# Altium PCB 175-00026, rev1, BlackFin Shorting Block.PcbDoc
Units mil, origin at the board's own origin, x right, y up, seen from the top; angles counter-clockwise.
Board outline 1220.47 x 1417.32 mil, 2 copper layers (Top Layer (*.GTL), Bottom Layer (*.GBL)); 4 components, 118 nets, 124 pads, 120 vias.
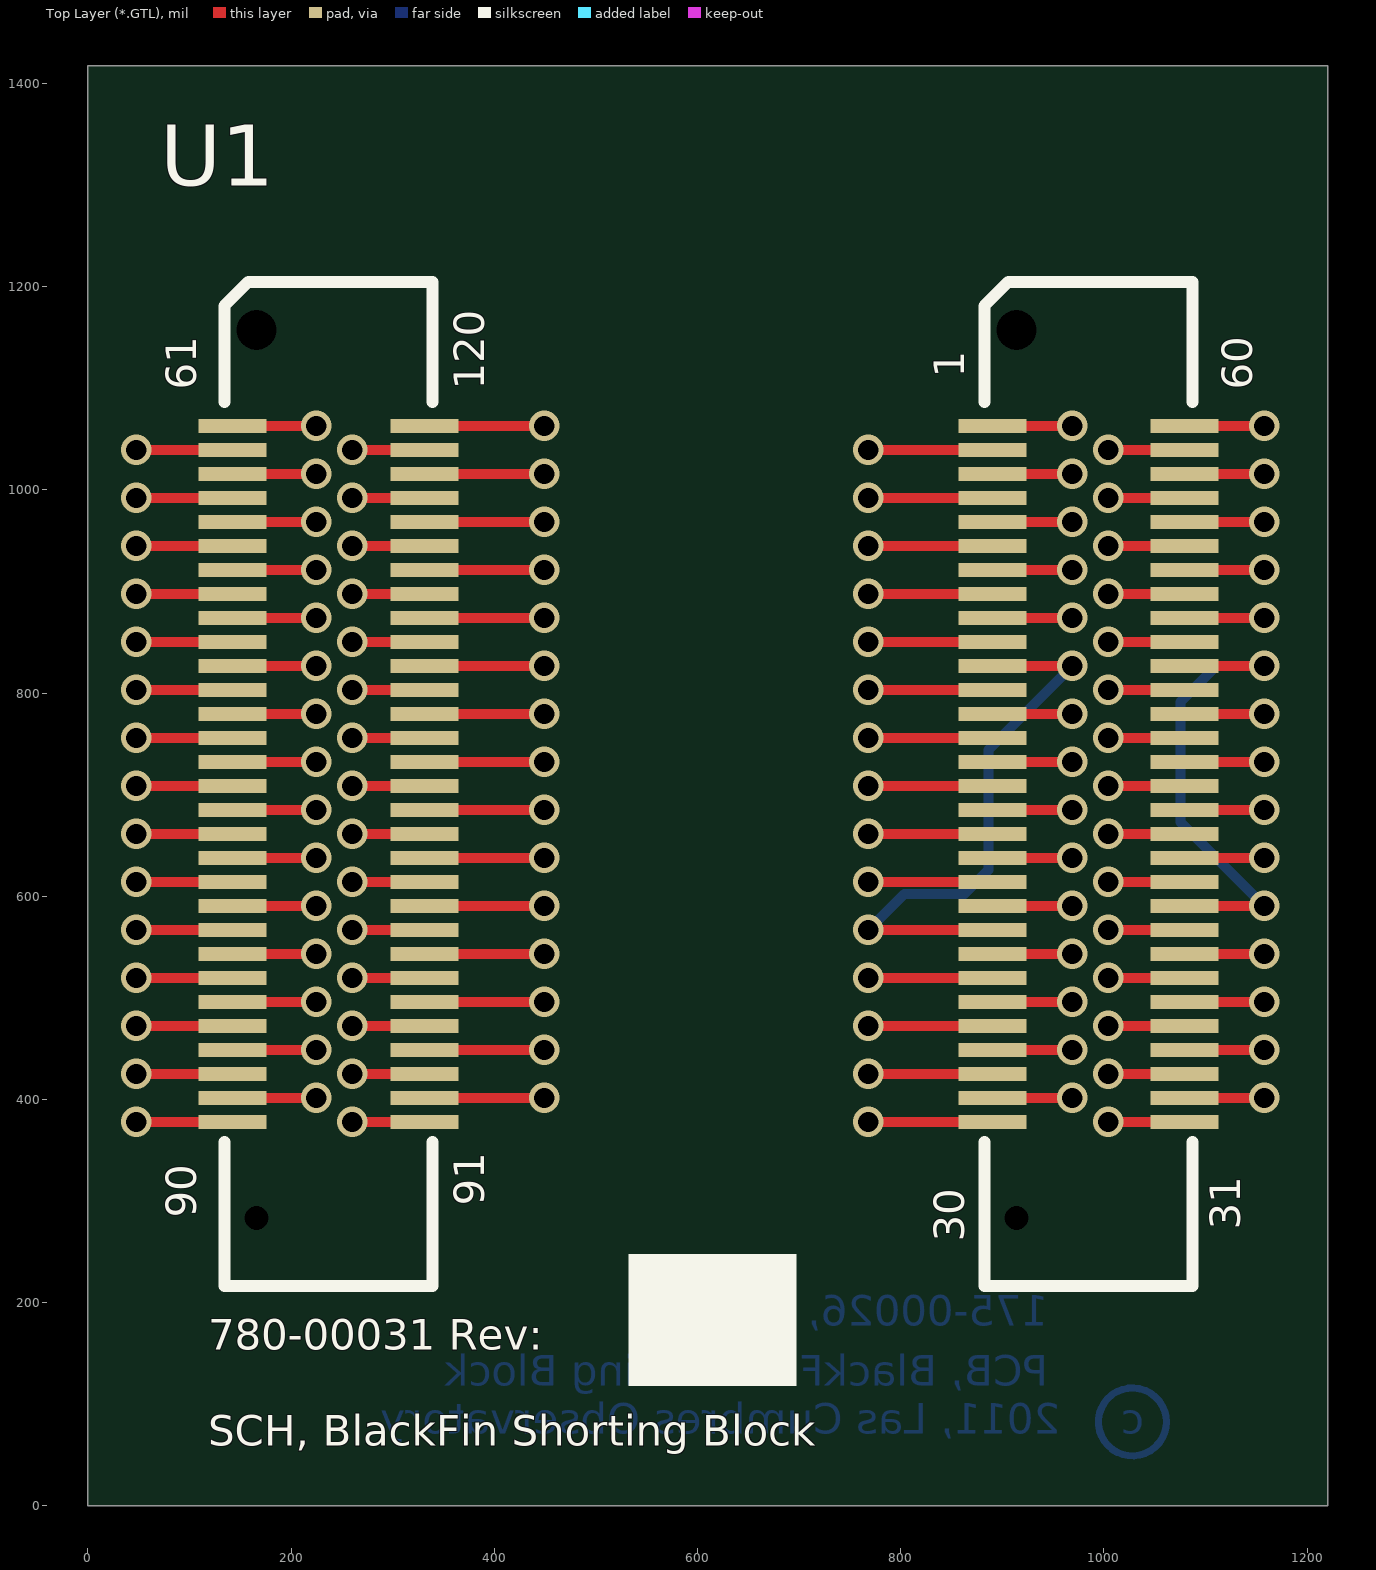
[diagram p0: Top Layer (*.GTL) view]
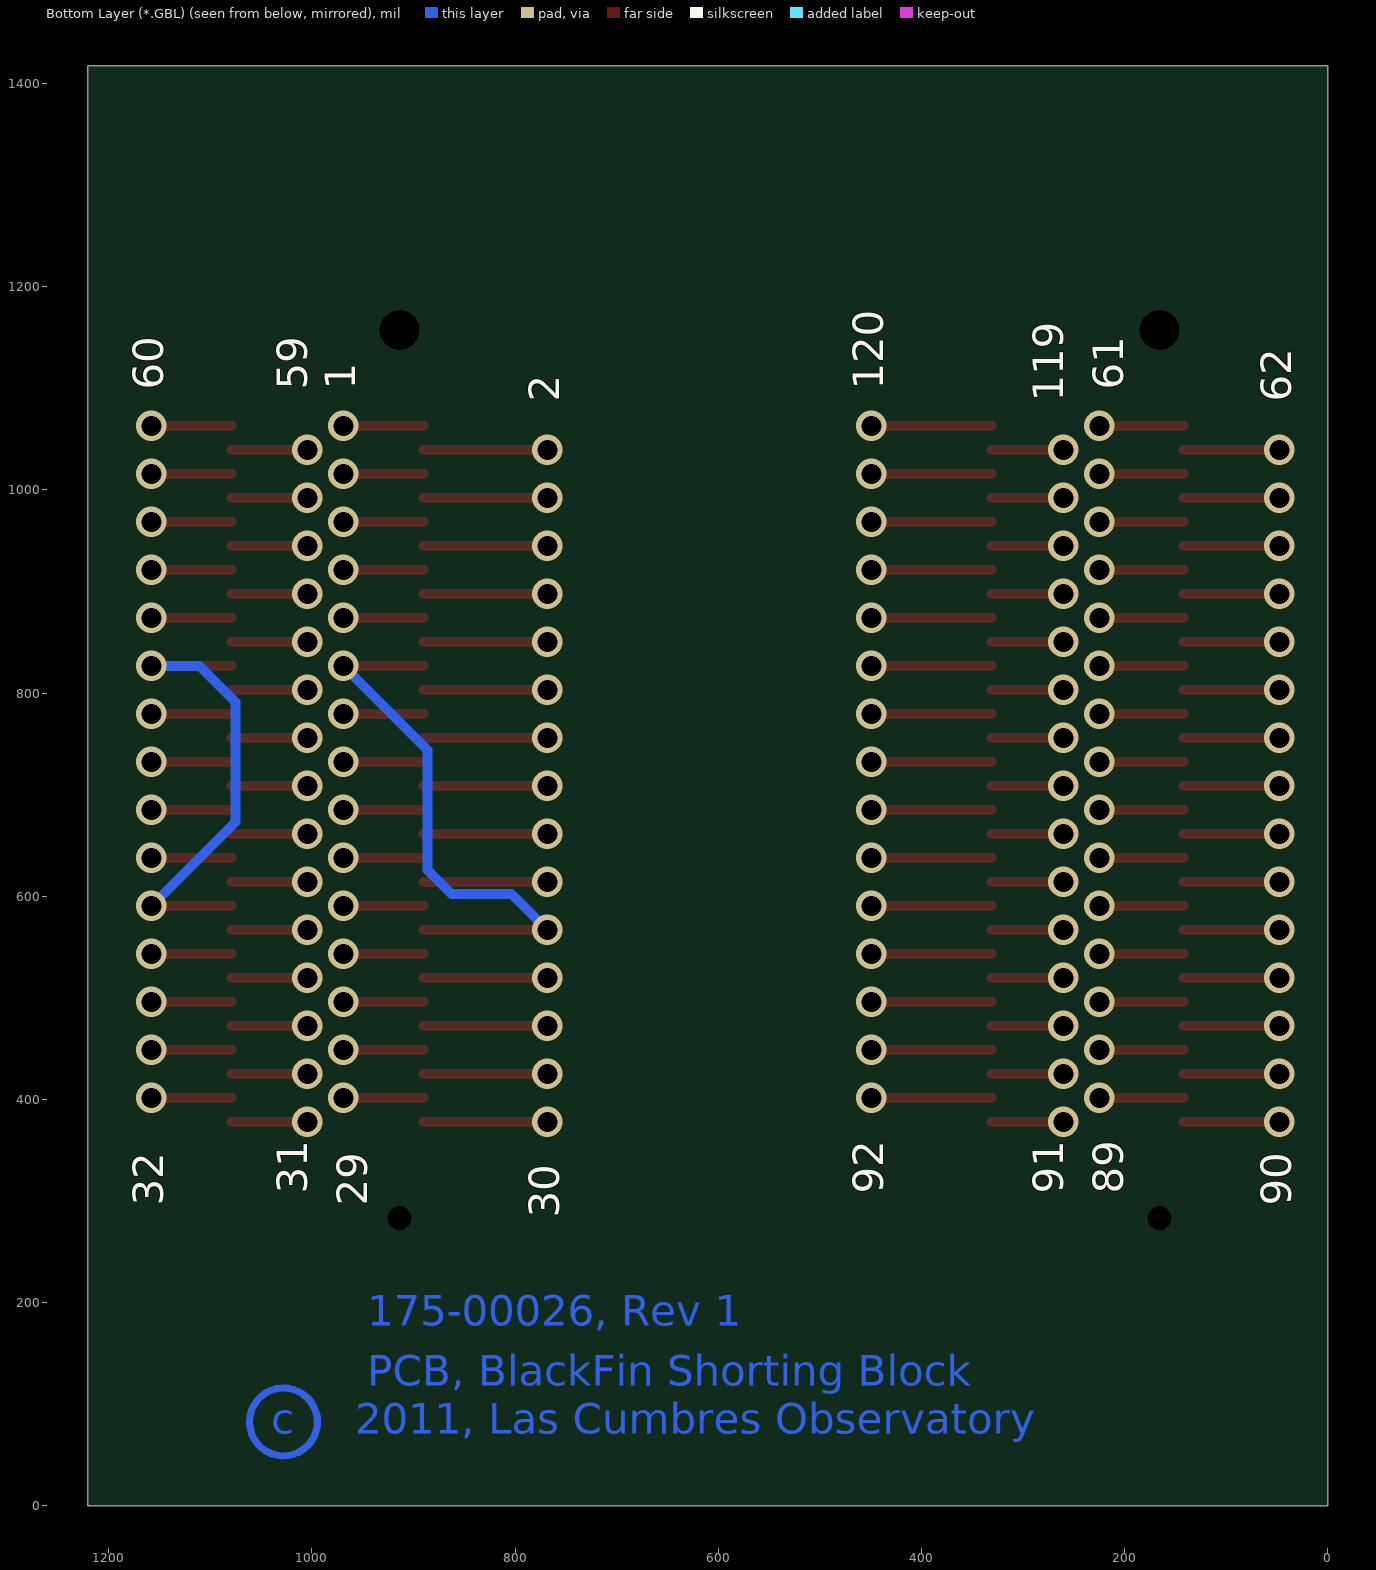
[diagram p1: Bottom Layer (*.GBL) view, seen from below]

## Layer stack, top to bottom
Top Layer (*.GTL): signal copper 1.4
Dielectric: core 12.6, FR-4, Dk 4.8
Bottom Layer (*.GBL): signal copper 1.4

## Board outline
0,0 0,1417.32 1220.47,1417.32 1220.47,0

## Design rules (kind name [scope] priority, off if disabled: settings)
Clearance [All] p1: gap=7
MinimumSolderMaskSliver [All] p1: minsoldermaskwidth=1
PolygonConnect [All] p1: connectstyle=Relief reliefconductorwidth=10 reliefentries=4 polygonreliefangle="90 Angle"
RoomDefinition "780-00031, rev1, BlackFin Shorting Block" [InComponentClass('780-00031, rev1, BlackFin Shorting Block')] p1: confinementstyle=ConfineIn formatcopy=TRUE lockcomponents=FALSE outline -13.46,-13.94 -13.46,1431.26 1234.88,1431.26 1234.88,-13.94
RoutingVias [All] p1: holewidth=28 width=50 viastyle="Through Hole" minholewidth=10 minwidth=20 maxholewidth=28 maxwidth=50
SilkToSilkClearance [All] p1: silktosilkclearance=2
SilkscreenOverComponentPads [All] p1: minsilkscreentomaskgap=2
SolderMaskExpansion [All] p1: expansion=4
Width [All] p1: maxlimit=10 minlimit=5 preferedwidth=10
25 further rules are at their usual default settings.

## Classes and differential pairs
component class "780-00031, rev1, BlackFin Shorting Block": U1

## Components (designator, comment, footprint, x,y, rotation, side; value= is the part's Value field where it differs from the comment)
1 "Comment" "TARGET MECHANICAL 5" 1806,1964 r0 top
2 "Comment" "TARGET MECHANICAL 5" -928,-330 r0 top
U1 "BlackFin Jumper" "CM-BF5xx - Shorting Block" 610.71,720.47 r0 top locked
? "Comment" "TARGET MECHANICAL 5" -914,1901 r0 top

## Footprints (in the part's own frame and the unit in brackets; to place one, negate y for a bottom-side part, rotate by r counter-clockwise, add the part's x,y. Pads: shape width x height; smd on the part's side, far side on the other; paste and mask are expansions set on the pad)
"CM-BF5xx - Shorting Block" [mm] "For jumper board that replaces BF module"
  rect 1.7x0.35 smd: 1(7.1,8.7) 2(7.1,8.1) 3(7.1,7.5) 4(7.1,6.9) 5(7.1,6.3) 6(7.1,5.7) 7(7.1,5.1) 8(7.1,4.5) 9(7.1,3.9) 10(7.1,3.3) 11(7.1,2.7) 12(7.1,2.1) 13(7.1,1.5) 14(7.1,0.9) 15(7.1,0.3) 16(7.1,-0.3) 17(7.1,-0.9) 18(7.1,-1.5) 19(7.1,-2.1) 20(7.1,-2.7) 21(7.1,-3.3) 22(7.1,-3.9) 23(7.1,-4.5) 24(7.1,-5.1) 25(7.1,-5.7) 26(7.1,-6.3) 27(7.1,-6.9) 28(7.1,-7.5) 29(7.1,-8.1) 30(7.1,-8.7) 31(11.9,-8.7) 32(11.9,-8.1) 33(11.9,-7.5) 34(11.9,-6.9) 35(11.9,-6.3) 36(11.9,-5.7) 37(11.9,-5.1) 38(11.9,-4.5) 39(11.9,-3.9) 40(11.9,-3.3) 41(11.9,-2.7) 42(11.9,-2.1) 43(11.9,-1.5) 44(11.9,-0.9) 45(11.9,-0.3) 46(11.9,0.3) 47(11.9,0.9) 48(11.9,1.5) 49(11.9,2.1) 50(11.9,2.7) 51(11.9,3.3) 52(11.9,3.9) 53(11.9,4.5) 54(11.9,5.1) 55(11.9,5.7) 56(11.9,6.3) 57(11.9,6.9) 58(11.9,7.5) 59(11.9,8.1) 60(11.9,8.7) 61(-11.9,8.7) 62(-11.9,8.1) 63(-11.9,7.5) 64(-11.9,6.9) 65(-11.9,6.3) 66(-11.9,5.7) 67(-11.9,5.1) 68(-11.9,4.5) 69(-11.9,3.9) 70(-11.9,3.3) 71(-11.9,2.7) 72(-11.9,2.1) 73(-11.9,1.5) 74(-11.9,0.9) 75(-11.9,0.3) 76(-11.9,-0.3) 77(-11.9,-0.9) 78(-11.9,-1.5) 79(-11.9,-2.1) 80(-11.9,-2.7) 81(-11.9,-3.3) 82(-11.9,-3.9) 83(-11.9,-4.5) 84(-11.9,-5.1) 85(-11.9,-5.7) 86(-11.9,-6.3) 87(-11.9,-6.9) 88(-11.9,-7.5) 89(-11.9,-8.1) 90(-11.9,-8.7) 91(-7.1,-8.7) 92(-7.1,-8.1) 93(-7.1,-7.5) 94(-7.1,-6.9) 95(-7.1,-6.3) 96(-7.1,-5.7) 97(-7.1,-5.1) 98(-7.1,-4.5) 99(-7.1,-3.9) 100(-7.1,-3.3) 101(-7.1,-2.7) 102(-7.1,-2.1) 103(-7.1,-1.5) 104(-7.1,-0.9) 105(-7.1,-0.3) 106(-7.1,0.3) 107(-7.1,0.9) 108(-7.1,1.5) 109(-7.1,2.1) 110(-7.1,2.7) 111(-7.1,3.3) 112(-7.1,3.9) 113(-7.1,4.5) 114(-7.1,5.1) 115(-7.1,5.7) 116(-7.1,6.3) 117(-7.1,6.9) 118(-7.1,7.5) 119(-7.1,8.1) 120(-7.1,8.7)
  round 0 hole 1 unplated: Hole1(-11.3,11.1) Hole1(7.7,11.1)
  round 0 hole 0.6 unplated: Hole2(-11.3,-11.1) Hole2(7.7,-11.1)
  silkscreen extent -12.1,-12.8 12.1,12.3
"TARGET MECHANICAL 5" [mil]

## Part data
U1: "Jumper to replace BF with shorting block"

## Via types
v1: diameter 30, hole 20, Top Layer (*.GTL) to Bottom Layer (*.GBL), 120 vias

## Nets (pads, with @x,y where several pads share a name; then routed paths per layer and width w, separated by ;. In a path a pad name is that pad's centre, name@x,y a point inside that pad or via, vN(x,y) a via of type N, cw(c..) or ccw(c..) an arc to the next point about the centre after c; other vN are vias at no path point)
1: U1.1 | length 78.7
  Top Layer (*.GTL) w10: U1.1 v1(968.98,1062.99)
2: U1.2 | length 122
  Top Layer (*.GTL) w10: v1(768.19,1039.37) U1.2
3: U1.3 | length 78.7
  Top Layer (*.GTL) w10: U1.3 v1(968.98,1015.75)
4: U1.4 | length 122
  Top Layer (*.GTL) w10: v1(768.19,992.13) U1.4
5: U1.5 | length 78.7
  Top Layer (*.GTL) w10: U1.5 v1(968.98,968.5)
6: U1.6 | length 122
  Top Layer (*.GTL) w10: v1(768.19,944.88) U1.6
7: U1.7 | length 78.7
  Top Layer (*.GTL) w10: U1.7 v1(968.98,921.26)
8: U1.8 | length 122
  Top Layer (*.GTL) w10: v1(768.19,897.64) U1.8
9: U1.9 | length 78.7
  Top Layer (*.GTL) w10: U1.9 v1(968.98,874.02)
10: U1.10 | length 122
  Top Layer (*.GTL) w10: v1(768.19,850.39) U1.10
12: U1.12 | length 122
  Top Layer (*.GTL) w10: v1(768.19,803.15) U1.12
13: U1.13 | length 78.7
  Top Layer (*.GTL) w10: U1.13 v1(968.98,779.53)
14: U1.14 | length 122
  Top Layer (*.GTL) w10: v1(768.19,755.91) U1.14
15: U1.15 | length 78.7
  Top Layer (*.GTL) w10: U1.15 v1(968.98,732.28)
16: U1.16 | length 122
  Top Layer (*.GTL) w10: v1(768.19,708.66) U1.16
17: U1.17 | length 78.7
  Top Layer (*.GTL) w10: U1.17 v1(968.98,685.04)
18: U1.18 | length 122
  Top Layer (*.GTL) w10: v1(768.19,661.42) U1.18
19: U1.19 | length 78.7
  Top Layer (*.GTL) w10: U1.19 v1(968.98,637.8)
20: U1.20 | length 122
  Top Layer (*.GTL) w10: v1(768.19,614.17) U1.20
21: U1.21 | length 78.7
  Top Layer (*.GTL) w10: U1.21 v1(968.98,590.55)
23: U1.23 | length 78.7
  Top Layer (*.GTL) w10: U1.23 v1(968.98,543.31)
24: U1.24 | length 122
  Top Layer (*.GTL) w10: v1(768.19,519.69) U1.24
25: U1.25 | length 78.7
  Top Layer (*.GTL) w10: U1.25 v1(968.98,496.06)
26: U1.26 | length 122
  Top Layer (*.GTL) w10: v1(768.19,472.44) U1.26
27: U1.27 | length 78.7
  Top Layer (*.GTL) w10: U1.27 v1(968.98,448.82)
28: U1.28 | length 122
  Top Layer (*.GTL) w10: v1(768.19,425.2) U1.28
29: U1.29 | length 78.7
  Top Layer (*.GTL) w10: U1.29 v1(968.98,401.57)
30: U1.30 | length 122
  Top Layer (*.GTL) w10: v1(768.19,377.95) U1.30
31: U1.31 | length 74.8
  Top Layer (*.GTL) w10: v1(1004.41,377.95) U1.31
32: U1.32 | length 78.7
  Top Layer (*.GTL) w10: U1.32 v1(1157.95,401.57)
33: U1.33 | length 74.8
  Top Layer (*.GTL) w10: v1(1004.41,425.2) U1.33
34: U1.34 | length 78.7
  Top Layer (*.GTL) w10: U1.34 v1(1157.95,448.82)
35: U1.35 | length 74.8
  Top Layer (*.GTL) w10: v1(1004.41,472.44) U1.35
36: U1.36 | length 78.7
  Top Layer (*.GTL) w10: U1.36 v1(1157.95,496.06)
37: U1.37 | length 74.8
  Top Layer (*.GTL) w10: v1(1004.41,519.69) U1.37
38: U1.38 | length 78.7
  Top Layer (*.GTL) w10: U1.38 v1(1157.95,543.31)
39: U1.39 | length 74.8
  Top Layer (*.GTL) w10: v1(1004.41,566.93) U1.39
41: U1.41 | length 74.8
  Top Layer (*.GTL) w10: v1(1004.41,614.17) U1.41
42: U1.42 | length 78.7
  Top Layer (*.GTL) w10: U1.42 v1(1157.95,637.8)
43: U1.43 | length 74.8
  Top Layer (*.GTL) w10: v1(1004.41,661.42) U1.43
44: U1.44 | length 78.7
  Top Layer (*.GTL) w10: U1.44 v1(1157.95,685.04)
45: U1.45 | length 74.8
  Top Layer (*.GTL) w10: v1(1004.41,708.66) U1.45
46: U1.46 | length 78.7
  Top Layer (*.GTL) w10: U1.46 v1(1157.95,732.28)
47: U1.47 | length 74.8
  Top Layer (*.GTL) w10: v1(1004.41,755.91) U1.47
48: U1.48 | length 78.7
  Top Layer (*.GTL) w10: U1.48 v1(1157.95,779.53)
49: U1.49 | length 74.8
  Top Layer (*.GTL) w10: v1(1004.41,803.15) U1.49
51: U1.51 | length 74.8
  Top Layer (*.GTL) w10: v1(1004.41,850.39) U1.51
52: U1.52 | length 78.7
  Top Layer (*.GTL) w10: U1.52 v1(1157.95,874.02)
53: U1.53 | length 74.8
  Top Layer (*.GTL) w10: v1(1004.41,897.64) U1.53
54: U1.54 | length 78.7
  Top Layer (*.GTL) w10: U1.54 v1(1157.95,921.26)
55: U1.55 | length 74.8
  Top Layer (*.GTL) w10: v1(1004.41,944.88) U1.55
56: U1.56 | length 78.7
  Top Layer (*.GTL) w10: U1.56 v1(1157.95,968.5)
57: U1.57 | length 74.8
  Top Layer (*.GTL) w10: v1(1004.41,992.13) U1.57
58: U1.58 | length 78.7
  Top Layer (*.GTL) w10: U1.58 v1(1157.95,1015.75)
59: U1.59 | length 74.8
  Top Layer (*.GTL) w10: v1(1004.41,1039.37) U1.59
60: U1.60 | length 78.7
  Top Layer (*.GTL) w10: U1.60 v1(1157.95,1062.99)
61: U1.61 | length 82.7
  Top Layer (*.GTL) w10: U1.61 v1(224.88,1062.99)
62: U1.62 | length 94.5
  Top Layer (*.GTL) w10: v1(47.72,1039.37) U1.62
63: U1.63 | length 82.7
  Top Layer (*.GTL) w10: U1.63 v1(224.88,1015.75)
64: U1.64 | length 94.5
  Top Layer (*.GTL) w10: v1(47.72,992.13) U1.64
65: U1.65 | length 82.7
  Top Layer (*.GTL) w10: U1.65 v1(224.88,968.5)
66: U1.66 | length 94.5
  Top Layer (*.GTL) w10: v1(47.72,944.88) U1.66
67: U1.67 | length 82.7
  Top Layer (*.GTL) w10: U1.67 v1(224.88,921.26)
68: U1.68 | length 94.5
  Top Layer (*.GTL) w10: v1(47.72,897.64) U1.68
69: U1.69 | length 82.7
  Top Layer (*.GTL) w10: U1.69 v1(224.88,874.02)
70: U1.70 | length 94.5
  Top Layer (*.GTL) w10: v1(47.72,850.39) U1.70
71: U1.71 | length 82.7
  Top Layer (*.GTL) w10: U1.71 v1(224.88,826.77)
72: U1.72 | length 94.5
  Top Layer (*.GTL) w10: v1(47.72,803.15) U1.72
73: U1.73 | length 82.7
  Top Layer (*.GTL) w10: U1.73 v1(224.88,779.53)
74: U1.74 | length 94.5
  Top Layer (*.GTL) w10: v1(47.72,755.91) U1.74
75: U1.75 | length 82.7
  Top Layer (*.GTL) w10: U1.75 v1(224.88,732.28)
76: U1.76 | length 94.5
  Top Layer (*.GTL) w10: v1(47.72,708.66) U1.76
77: U1.77 | length 82.7
  Top Layer (*.GTL) w10: U1.77 v1(224.88,685.04)
78: U1.78 | length 94.5
  Top Layer (*.GTL) w10: v1(47.72,661.42) U1.78
79: U1.79 | length 82.7
  Top Layer (*.GTL) w10: U1.79 v1(224.88,637.8)
80: U1.80 | length 94.5
  Top Layer (*.GTL) w10: v1(47.72,614.17) U1.80
81: U1.81 | length 82.7
  Top Layer (*.GTL) w10: U1.81 v1(224.88,590.55)
82: U1.82 | length 94.5
  Top Layer (*.GTL) w10: v1(47.72,566.93) U1.82
83: U1.83 | length 82.7
  Top Layer (*.GTL) w10: U1.83 v1(224.88,543.31)
84: U1.84 | length 94.5
  Top Layer (*.GTL) w10: v1(47.72,519.69) U1.84
85: U1.85 | length 82.7
  Top Layer (*.GTL) w10: U1.85 v1(224.88,496.06)
86: U1.86 | length 94.5
  Top Layer (*.GTL) w10: v1(47.72,472.44) U1.86
87: U1.87 | length 82.7
  Top Layer (*.GTL) w10: U1.87 v1(224.88,448.82)
88: U1.88 | length 94.5
  Top Layer (*.GTL) w10: v1(47.72,425.2) U1.88
89: U1.89 | length 82.7
  Top Layer (*.GTL) w10: U1.89 v1(224.88,401.57)
90: U1.90 | length 94.5
  Top Layer (*.GTL) w10: v1(47.72,377.95) U1.90
91: U1.91 | length 70.9
  Top Layer (*.GTL) w10: v1(260.31,377.95) U1.91
92: U1.92 | length 118.1
  Top Layer (*.GTL) w10: U1.92 v1(449.29,401.57)
93: U1.93 | length 70.9
  Top Layer (*.GTL) w10: v1(260.31,425.2) U1.93
94: U1.94 | length 118.1
  Top Layer (*.GTL) w10: U1.94 v1(449.29,448.82)
95: U1.95 | length 70.9
  Top Layer (*.GTL) w10: v1(260.31,472.44) U1.95
96: U1.96 | length 118.1
  Top Layer (*.GTL) w10: U1.96 v1(449.29,496.06)
97: U1.97 | length 70.9
  Top Layer (*.GTL) w10: v1(260.31,519.69) U1.97
98: U1.98 | length 118.1
  Top Layer (*.GTL) w10: U1.98 v1(449.29,543.31)
99: U1.99 | length 70.9
  Top Layer (*.GTL) w10: v1(260.31,566.93) U1.99
100: U1.100 | length 118.1
  Top Layer (*.GTL) w10: U1.100 v1(449.29,590.55)
101: U1.101 | length 70.9
  Top Layer (*.GTL) w10: v1(260.31,614.17) U1.101
102: U1.102 | length 118.1
  Top Layer (*.GTL) w10: U1.102 v1(449.29,637.8)
103: U1.103 | length 70.9
  Top Layer (*.GTL) w10: v1(260.31,661.42) U1.103
104: U1.104 | length 118.1
  Top Layer (*.GTL) w10: U1.104 v1(449.29,685.04)
105: U1.105 | length 70.9
  Top Layer (*.GTL) w10: v1(260.31,708.66) U1.105
106: U1.106 | length 118.1
  Top Layer (*.GTL) w10: U1.106 v1(449.29,732.28)
107: U1.107 | length 70.9
  Top Layer (*.GTL) w10: v1(260.31,755.91) U1.107
108: U1.108 | length 118.1
  Top Layer (*.GTL) w10: U1.108 v1(449.29,779.53)
109: U1.109 | length 70.9
  Top Layer (*.GTL) w10: v1(260.31,803.15) U1.109
110: U1.110 | length 118.1
  Top Layer (*.GTL) w10: U1.110 v1(449.29,826.77)
111: U1.111 | length 70.9
  Top Layer (*.GTL) w10: v1(260.32,850.39) U1.111
112: U1.112 | length 118.1
  Top Layer (*.GTL) w10: U1.112 v1(449.29,874.02)
113: U1.113 | length 70.9
  Top Layer (*.GTL) w10: v1(260.31,897.64) U1.113
114: U1.114 | length 118.1
  Top Layer (*.GTL) w10: U1.114 v1(449.29,921.26)
115: U1.115 | length 70.9
  Top Layer (*.GTL) w10: v1(260.31,944.88) U1.115
116: U1.116 | length 118.1
  Top Layer (*.GTL) w10: U1.116 v1(449.29,968.5)
117: U1.117 | length 70.9
  Top Layer (*.GTL) w10: v1(260.31,992.13) U1.117
118: U1.118 | length 118.1
  Top Layer (*.GTL) w10: U1.118 v1(449.29,1015.75)
119: U1.119 | length 70.9
  Top Layer (*.GTL) w10: v1(260.32,1039.37) U1.119
120: U1.120 | length 118.1
  Top Layer (*.GTL) w10: U1.120 v1(449.29,1062.99)
RS485_RX: U1.11 U1.22 | length 578.4
  Top Layer (*.GTL) w10: v1(768.19,566.93) U1.22 ; U1.11 v1(968.98,826.77)
  Bottom Layer (*.GBL) w10: v1(768.19,566.93) 803.62,602.36 862.68,602.36 886.3,625.98 886.3,744.09 v1(968.98,826.77)
RS485_TX: U1.40 U1.50 | length 489.9
  Top Layer (*.GTL) w10: U1.40 v1(1157.95,590.55) ; U1.50 v1(1157.95,826.77)
  Bottom Layer (*.GBL) w10: v1(1157.95,590.55) 1075.28,673.23 1075.28,791.34 1110.71,826.77 v1(1157.95,826.77)
pads on no net: U1.Hole1 U1.Hole2
copper on no net: | length 209.9
  Bottom Layer (*.GBL) w7: 1061.44,82.68 ccw(c1028.03,82.68) 1061.44,82.68

## Other copper
Top Layer (*.GTL):
  text "*.GTL - TOP LAYER GERBER DATA" at -582,-1181 h80
Bottom Layer (*.GBL):
  text "175-00026, Rev 1" at 945.35,177.17 h30
  text "PCB, BlackFin Shorting Block" at 945.35,118.11 h30
  text "2011, Las Cumbres Observatory" at 957.17,70.87 h30
  text "c" at 1039.84,70.87 h30
  text "*.GBL - BOTTOM LAYER GERBER DATA" at -582,-1181 h80

## Silkscreen, mask and mechanical layers (free items; w line width, h text height)
Top Overlay:
  rectangle: 531.97,118.11 697.32,248.03
  text "1" at 862.68,1110.24 h30 r90
  text "61" at 106.77,1098.43 h30 r90
  text "120" at 390.24,1098.43 h30 r90
  text "60" at 1146.14,1098.43 h30 r90
  text "91" at 390.24,295.28 h30 r90
  text "90" at 106.77,283.46 h30 r90
  text "31" at 1134.33,271.65 h30 r90
  text "30" at 862.68,259.84 h30 r90
  text "780-00031 Rev:" at 118.58,153.54 h30
  text "SCH, BlackFin Shorting Block" at 118.58,59.06 h30
  text "*.GTO - TOP OVERLAY GERBER DATA" at -582,-1181 h80
Bottom Overlay:
  text "61" at 201.26,1098.43 h30 r270
  text "120" at 437.48,1098.43 h30 r270
  text "1" at 957.17,1098.43 h30 r270
  text "59" at 1004.41,1098.43 h30 r270
  text "60" at 1146.14,1098.43 h30 r270
  text "62" at 35.91,1086.61 h30 r270
  text "119" at 260.31,1086.61 h30 r270
  text "2" at 756.38,1086.61 h30 r270
  text "89" at 201.26,307.09 h30 r270
  text "91" at 260.31,307.09 h30 r270
  text "92" at 437.48,307.09 h30 r270
  text "31" at 1004.41,307.09 h30 r270
  text "90" at 35.91,295.28 h30 r270
  text "29" at 945.35,295.28 h30 r270
  text "32" at 1146.14,295.28 h30 r270
  text "30" at 756.38,283.46 h30 r270
  text "*GBO - BOTTOM OVERLAY GERBER DATA" at -582,-1181 h80
Top Paste:
  text "*.GTP - TOP-SIDE SOLDER PASTE MASK" at -582.01,-1180.99 h80
Bottom Paste:
  text "*.GBP - BOTTOM-SIDE SOLDER PASTE MASK" at -582.01,-1180.99 h80
Top Solder:
  text "*.GTS - TOP SOLDER MASK GERBER DATA" at -582,-1181 h80
Bottom Solder:
  rectangle: 83.15,35.43 1075.28,224.41
  text "*.GBS - BOTTOM SOLDER MASK GERBER DATA" at -582,-1181 h80
Mechanical 1:
  the board outline again, w20
Mechanical 2:
  lines w10: -14364.55,-7877.42 6635.45,-7877.42 6635.45,8122.58 -14364.55,8122.58 -14364.55,-7877.42 ; 2580.45,-7771.42 ccw(c2630.45,-7771.42) 2630.45,-7821.42 2960.45,-7821.42 ccw(c2960.45,-7781.42) 3000.45,-7781.42 3000.45,-7611.42 ccw(c2960.45,-7611.42) 2960.45,-7571.42 2580.45,-7571.42 2580.45,-7771.42 ; 2580.45,-7481.42 ccw(c2630.45,-7481.42) 2630.45,-7531.42 6530.45,-7531.42 ccw(c6530.45,-7481.42) 6580.45,-7481.42 6580.45,-7291.42 ccw(c6530.45,-7291.42) 6530.45,-7241.42 2580.45,-7241.42 2580.45,-7481.42 ; 2580.45,-7151.42 ccw(c2630.45,-7151.42) 2630.45,-7201.42 4510.45,-7201.42 ccw(c4510.45,-7151.42) 4560.45,-7151.42 4560.45,-7001.42 ccw(c4510.45,-7001.42) 4510.45,-6951.42 2580.45,-6951.42 2580.45,-7151.42 ; 2580.45,-6871.42 ccw(c2620.45,-6871.42) 2620.45,-6911.42 3430.45,-6911.42 ccw(c3430.45,-6861.42) 3480.45,-6861.42 3480.45,-6711.42 ccw(c3430.45,-6711.42) 3430.45,-6661.42 2580.45,-6661.42 2580.45,-6871.42 ; 3040.45,-7781.42 ccw(c3080.45,-7781.42) 3080.45,-7821.42 5040.45,-7821.42 ccw(c5040.45,-7781.42) 5080.45,-7781.42 5080.45,-7611.42 ccw(c5040.45,-7611.42) 5040.45,-7571.42 3040.45,-7571.42 3040.45,-7781.42 ; 3520.45,-6861.42 ccw(c3570.45,-6861.42) 3570.45,-6911.42 4510.45,-6911.42 ccw(c4510.45,-6861.42) 4560.45,-6861.42 4560.45,-6711.42 ccw(c4510.45,-6711.42) 4510.45,-6661.42 3520.45,-6661.42 3520.45,-6861.42 ; 4600.45,-7151.42 ccw(c4650.45,-7151.42) 4650.45,-7201.42 6530.45,-7201.42 ccw(c6530.45,-7151.42) 6580.45,-7151.42 6580.45,-7001.42 ccw(c6530.45,-7001.42) 6530.45,-6951.42 4600.45,-6951.42 4600.45,-7151.42 ; 4600.45,-6861.42 ccw(c4650.45,-6861.42) 4650.45,-6911.42 5590.45,-6911.42 ccw(c5590.45,-6861.42) 5640.45,-6861.42 5640.45,-6711.42 ccw(c5590.45,-6711.42) 5590.45,-6661.42 4600.45,-6661.42 4600.45,-6861.42 ; 5120.45,-7771.42 ccw(c5170.45,-7771.42) 5170.45,-7821.42 5500.45,-7821.42 ccw(c5500.45,-7781.42) 5540.45,-7781.42 5540.45,-7611.42 ccw(c5500.45,-7611.42) 5500.45,-7571.42 5120.45,-7571.42 5120.45,-7771.42 ; 5580.45,-7781.42 ccw(c5620.45,-7781.42) 5620.45,-7821.42 6530.45,-7821.42 ccw(c6530.45,-7771.42) 6580.45,-7771.42 6580.45,-7621.42 ccw(c6530.45,-7621.42) 6530.45,-7571.42 5580.45,-7571.42 5580.45,-7781.42 ; 5680.45,-6861.42 ccw(c5730.45,-6861.42) 5730.45,-6911.42 6530.45,-6911.42 ccw(c6530.45,-6861.42) 6580.45,-6861.42 6580.45,-6711.42 ccw(c6530.45,-6711.42) 6530.45,-6661.42 5680.45,-6661.42 5680.45,-6861.42
  lines w16: -13645,-3979.6 -8475,-3979.6 ; -13645,-3680.7 -8475,-3680.7 ; -13705,-6041 ccw(c-13608,-6041) -13608,-6138 -8512,-6138 ccw(c-8512,-6041) -8415,-6041 -8415,-2651 ccw(c-8512,-2651) -8512,-2554 -13608,-2554 ccw(c-13608,-2651) -13705,-2651 -13705,-6041
  lines w20: -14344.49,-7231.54 cw(c-14294.55,-7306.42) -14294.55,-7216.42 -13834.55,-7216.42 cw(c-13834.55,-7306.42) -13744.55,-7306.42 -13744.55,-7356.42 ccw(c-13734.55,-7356.42) -13734.55,-7366.42 -11094.55,-7366.42 cw(c-11094.55,-7456.42) -11004.55,-7456.42 -11004.55,-7796.42 cw(c-11094.55,-7796.42) -11019.68,-7846.35 ; 2536.62,-7861.4 cw(c2630.45,-7771.42) 2500.45,-7771.42 2500.45,-6101.42 cw(c2630.45,-6101.42) 2630.45,-5971.42 6530.45,-5971.42 cw(c6530.45,-6101.42) 6619.11,-6006.34 ; -14344.55,-7796.42 ccw(c-14294.55,-7796.42) -14294.55,-7846.42 -11094.55,-7846.42 ccw(c-11094.55,-7796.42) -11044.55,-7796.42 -11044.55,-7456.42 ccw(c-11094.55,-7456.42) -11094.55,-7406.42 -13734.55,-7406.42 cw(c-13734.55,-7356.42) -13784.55,-7356.42 -13784.55,-7306.42 ccw(c-13834.55,-7306.42) -13834.55,-7256.42 -14294.55,-7256.42 ccw(c-14294.55,-7306.42) -14344.55,-7306.42 -14344.55,-7796.42 ; -6834.55,-7697.42 ccw(c-6704.55,-7697.42) -6704.55,-7827.42 -1964.55,-7827.42 ccw(c-1964.55,-7697.42) -1834.55,-7697.42 -1834.55,-6107.42 ccw(c-1964.55,-6107.42) -1964.55,-5977.42 -6704.55,-5977.42 ccw(c-6704.55,-6107.42) -6834.55,-6107.42 -6834.55,-7697.42 ; 2540.45,-7771.42 ccw(c2630.45,-7771.42) 2630.45,-7861.42 6530.45,-7861.42 ccw(c6530.45,-7771.42) 6620.45,-7771.42 6620.45,-6101.42 ccw(c6530.45,-6101.42) 6530.45,-6011.42 2630.45,-6011.42 ccw(c2630.45,-6101.42) 2540.45,-6101.42 2540.45,-7771.42
  lines w24: -4284.55,-7667.42 -4134.55,-7667.42 ; -4284.55,-7417.42 -4134.55,-7417.42 ; -4284.55,-7167.42 -4134.55,-7167.42 ; -4284.55,-6917.42 -4134.55,-6917.42 ; -4284.55,-6667.42 -4134.55,-6667.42
  lines w30: -14864.55,-8377.42 7135.45,-8377.42 7135.45,8622.58 -14864.55,8622.58 -14864.55,-8377.42
  lines w50: 2725.45,-6512.42 4375.45,-6512.42 ; 2725.45,-6132.42 4375.45,-6132.42 ; 4375.45,-6512.42 2715.45,-6512.42 2715.45,-6132.42 4375.45,-6132.42 ; 4375.45,-6512.42 4375.45,-6132.42
  text "NOTES (UNLESS OTHERWISE SPECIFIED):" at -14044.55,7598.58 h90
  text "GENERAL" at -13944.55,7398.58 h90
  text "1)" at -13844.55,7198.53 h75
  text "PCB IS 2-LAYER, .062\" THICK." at -13644.55,7198.55 h75
  text "2)" at -13844.55,7048.53 h75
  text "CONSTRUCTION IS SOLDER-MASK-OVER-BARE-COPPER (SMOBC)." at -13644.55,7048.53 h75
  text "3)" at -13844.55,6898.53 h75
  text "ACCEPTABILITY SHALL BE BASED ON IPC-A-600, CLASS 2." at -13644.55,6898.53 h75
  text "4)" at -13844.55,6748.53 h75
  text "THE FOLLOWING GERBER RS274X PHOTO TOOL FILES SHALL BE USED TO DEFINE ALL CIRCUIT FEATURES:" at -13644.55,6748.53 h75
  text "*.GTL - TOP LAYER GERBER DATA" at -13370.55,6537.58 h80
  text "*.GBL - BOTTOM LAYER GERBER DATA" at -13370.55,5154.59 h80
  text "*.GTO - TOP OVERLAY GERBER DATA" at -13370.55,5000.92 h80
  text "*.GTS - TOP SOLDER MASK GERBER DATA" at -13370.55,4847.25 h80
  text "*.GTP - TOP-SIDE SOLDER PASTE MASK" at -13370.56,4693.58 h80
  text "*GBO BOTTOM OVERLAY GERBER DATA" at -13370.55,4539.92 h80
  text "*.GBS - BOTTOM SOLDER MASK GERBER DATA" at -13370.55,4386.26 h80
  text "*.GBP - BOTTOM-SIDE SOLDER PASTE MASK" at -13370.56,4232.58 h80
  text "5)" at -13941.55,3516.82 h75
  text "THE PHOTO TOOL SHALL NOT BE COMPENSATED WITHOUT PRIOR ENGINEERING APPROVAL." at -13741.55,3516.82 h75
  text "PCB DESIGNER: RICH LOBDILL   PH (805) 880-1621  FAX (805) 961-1792." at -13741.55,3366.87 h75
  text "FABRICATION TOLERANCES" at -13886.55,3040.58 h90
  text "6)" at -13786.55,2840.53 h75
  text "END PRODUCT CONDUCTOR WIDTHS AND PAD DIAMETERS SHALL NOT VARY MORE THAN" at -13586.55,2840.53 h75
  text "0.002\" FROM THE 1:1 DIMENSIONS OF THE MASTER ARTWORK." at -13586.55,2690.58 h75
  text "7)" at -13786.55,2540.53 h75
  text "THE CONDUCTIVE PATTERN SHALL BE POSITIONED SO THAT THE LOCATION OF ANY PAD OR" at -13586.55,2540.53 h75
  text "LAND SHALL BE WITHIN 0.005\" DIAMETER TO THE TRUE POSITION OF THE HOLE IT CIRCUMSCRIBES." at -13586.55,2390.58 h75
  text "8)" at -13786.55,2240.53 h75
  text "ALL DRILL HOLE SIZES AND TOLERANCES APPLY AFTER PLATING." at -13586.55,2240.53 h75
  text "9)" at -13786.55,2090.53 h75
  text "THE MINIMUM ANNULAR RING SHALL BE 0.005\"." at -13586.55,2090.53 h75
  text "10)" at -13841.55,1940.53 h75
  text "BOW AND TWIST SHALL NOT EXCEED 0.010\" PER INCH." at -13586.55,1940.53 h75
  text "11)" at -13831.55,1790.53 h75
  text "FOR PCB ROUTING DIMENSIONS: .XXX = +/-.005\"  .XX = +/-.020\"" at -13586.55,1790.53 h75
  text "MATERIAL" at -13886.55,1590.58 h90
  text "12)" at -13841.55,1390.53 h75
  text "BASE MATERIAL IS FR4 EPOXY FIBERGLASS" at -13579.55,1384.58 h75
  text "SEE STACK-UP LEGEND FOR COPPER CLADDING CALL OUTS" at -13579.55,1244.58 h75
  text "13)" at -13841.55,1240.53 h75
  text "PLATING" at -13886.55,1040.58 h90
  text "14)" at -13841.55,845.53 h75
  text "ALL HOLES AND CONDUCTIVE SURFACES SHALL BE PLATED WITH A MINIMUM OF 0.001\" COPPER." at -13586.55,845.53 h75
  text "15)" at -13841.55,695.53 h75
  text "AFTER SOLDERMASK, ALL EXPOSED HOLES AND CONDUCTIVE SURFACES SHALL BE COATED" at -13586.55,695.53 h75
  text "WITH A GOLD IMMERSION PLATING TO PRESERVE SOLDERABILITY." at -13579.55,544.58 h75
  text "COATINGS" at -13886.55,345.58 h90
  text "16)" at -13836.55,150.53 h75
  text "THE SOLDERMASK SHALL BE BLACK LIQUID PHOTO-IMAGEABLE PER IPC-SM-840, TYPE-B, CLASS 2." at -13586.55,150.53 h75
  text "17)" at -13841.55,0.53 h75
  text "THE SOLDERMASK REGISTRATION ALLOWANCE IS 0.003\".  THERE SHALL BE NO SOLDERMASK ON" at -13586.55,0.53 h75
  text "ANY SOLDER PAD OR LAND." at -13586.55,-149.47 h75
  text "MARKING" at -13886.55,-349.42 h90
  text "18)" at -13841.55,-544.47 h75
  text "THE LEGEND SHALL BE SCREEN-PRINTED USING PERMANENT YELLOW EPOXY INK." at -13586.55,-544.47 h75
  text "19)" at -13841.55,-694.47 h75
  text "THE SCREEN PRINTING REGISTRATION ALLOWANCE IS 0.007\".  THERE SHALL BE NO INK ON ANY" at -13586.55,-694.47 h75
  text "SOLDER PAD OR LAND." at -13586.55,-844.42 h75
  text "20)" at -13851.55,-994.47 h75
  text "THE VENDOR CODE AND UL FLAMMABILITY RATING MAY BE ETCHED IN THE FOIL OR MARKED IN" at -13586.55,-994.47 h75
  text "PERMANENT EPOXY INK (VENDOR'S OPTION)." at -13586.55,-1144.42 h75
  text "ELECTRICAL TESTING" at -13886.55,-1344.42 h90
  text "21)" at -13841.55,-1539.47 h75
  text "ALL BOARDS SHALL BE ELECTRICALLY TESTED TO THE SUPPLIED IPC-D-356A NET LIST" at -13586.55,-1539.47 h75
  text "FOR CONTINUITY, OPENS AND SHORTS." at -13586.55,-1689.42 h75
  text "Layer Stack Up Detail for: 175-00026, rev1, BlackFin Shorting Block.PcbDoc" at -13645,-3164.55 h69
  text "Layer" at -13645,-3792.2 h69
  text "COPPER THICKNESS" at -10418,-3852 h60
  text "Name" at -13645,-3930.2 h69
  text "1/2 oz,  1 oz Finished" at -11260,-4474 h100
  text "Top Layer (*.GTL)" at -13645,-4475.2 h97
  text "Bottom Layer (*.GBL)" at -13645,-5450.4 h97
  text "1/2 oz,  1 oz Finished" at -11274,-5454 h100
  text "Las Cumbres Observatory, Inc." at 4545.45,-6152.42 h90
  text "Las Cumbres Observatory" at 2775.45,-6272.42 h150
  text "PRIMARY PCB SPECIFICATIONS" at -6387.55,-6287.42 h200
  text "6740 Cortona Dr." at 4985.45,-6306.42 h90
  text "Global Telescope Network" at 2935.45,-6432.42 h125
  text "Goleta, CA 93117" at 4935.45,-6456.42 h90
  text "(REFER TO COMPLETE SPEC LISTING AT LEFT FOR FURTHER DETAILS)" at -6734.55,-6492.42 h100
  text "www.lcogt.net" at 5075.45,-6602.42 h90
  text "DATE" at 2600.45,-6713.22 h32
  text "DESIGNED" at 3540.45,-6713.22 h32
  text "DRAWN" at 4620.45,-6713.22 h32
  text "SCALE" at 5700.45,-6713.22 h32
  text "NUMBER OF LAYERS" at -6634.55,-6742.42 h150
  text "2" at -3084.55,-6742.43 h150
  text "Rich Lobdill" at 4925.45,-6812.42 h55
  text "Rich Lobdill" at 3800.45,-6817.42 h55
  text "1 : 1" at 5985.45,-6831.42 h90
  text "3/21/2011" at 2630.45,-6838.42 h90
  text "FINISHED THICKNESS" at -6634.55,-6992.42 h150
  text ".062\"" at -3259.55,-6992.42 h150
  text "CHECKED/DATE" at 2600.45,-7003.22 h32
  text "APPROVED/DATE" at 4620.45,-7003.22 h32
  text "BASE MATERIAL" at -6634.55,-7242.42 h150
  text "FR4" at -3334.55,-7242.42 h150
  text "TITLE" at 2600.45,-7293.22 h32
  text "NOTICE" at -14289.55,-7401.42 h100
  text "175-00026, BLACKFIN SHORTING BLOCK" at 2820.45,-7437.42 h100
  text "GOLD IMMERSION" at -3828.55,-7459.42 h150
  text "PLATING TYPE" at -6634.55,-7492.42 h150
  text "THIS DRAWING EMBODIES A PROPRIETARY DESIGN OWNED BY LAS CUMBRES" at -14254.55,-7516.42 h60
  text "OBSERVATORY.  IT IS SUBMITTED FOR A SPECIFIC PURPOSE UNDER A CON-" at -14254.55,-7616.42 h60
  text "SIZE" at 2600.45,-7623.22 h32
  text "DOC NO." at 3060.45,-7623.22 h32
  text "REV" at 5140.45,-7623.22 h32
  text "SHEET" at 5600.45,-7623.22 h32
  text "FIDENTIAL RELATIONSHIP, AND EXCEPT FOR PURPOSES EXPRESSLY GRANTED" at -14254.55,-7711.42 h60
  text "OF" at 6030.45,-7726.42 h60
  text "SOLDER MASK COLOR" at -6634.55,-7742.42 h150
  text "BLACK" at -3209.55,-7742.42 h150
  text "1" at 5860.45,-7746.42 h100
  text "X" at 6260.45,-7746.42 h100
  text "1" at 5285.45,-7759.42 h130
  text "-" at 3615.45,-7761.42 h130
  text "GPT" at 4335.17,-7776.21 h130
  text "C" at 2735.45,-7777.42 h100
  text "IN WRITING, ALL RIGHTS ARE RESERVED BY LAS CUMBRES OBSERVATORY." at -14254.55,-7801.42 h60
Mechanical 5:
  text "175-00026 rev 1, BLACKFIN SHORTING BLOCK" at -560.97,-750.42 h80
  text "LAS CUMBRES OBSERVATORY     3/21/2011" at -560.97,-900.43 h80
Drill Drawing:
  lines w10: -14364.55,-7877.42 6635.45,-7877.42 6635.45,8122.58 -14364.55,8122.58 -14364.55,-7877.42 ; 2580.45,-7771.42 ccw(c2630.45,-7771.42) 2630.45,-7821.42 2960.45,-7821.42 ccw(c2960.45,-7781.42) 3000.45,-7781.42 3000.45,-7611.42 ccw(c2960.45,-7611.42) 2960.45,-7571.42 2580.45,-7571.42 2580.45,-7771.42 ; 2580.45,-7481.42 ccw(c2630.45,-7481.42) 2630.45,-7531.42 6530.45,-7531.42 ccw(c6530.45,-7481.42) 6580.45,-7481.42 6580.45,-7291.42 ccw(c6530.45,-7291.42) 6530.45,-7241.42 2580.45,-7241.42 2580.45,-7481.42 ; 2580.45,-7161.42 ccw(c2620.45,-7161.42) 2620.45,-7201.42 4040.45,-7201.42 ccw(c4040.45,-7151.42) 4090.45,-7151.42 4090.45,-7001.42 ccw(c4040.45,-7001.42) 4040.45,-6951.42 2580.45,-6951.42 2580.45,-7161.42 ; 3040.45,-7781.42 ccw(c3080.45,-7781.42) 3080.45,-7821.42 5040.45,-7821.42 ccw(c5040.45,-7781.42) 5080.45,-7781.42 5080.45,-7611.42 ccw(c5040.45,-7611.42) 5040.45,-7571.42 3040.45,-7571.42 3040.45,-7781.42 ; 4130.45,-7151.42 ccw(c4180.45,-7151.42) 4180.45,-7201.42 5590.45,-7201.42 ccw(c5590.45,-7151.42) 5640.45,-7151.42 5640.45,-7001.42 ccw(c5590.45,-7001.42) 5590.45,-6951.42 4130.45,-6951.42 4130.45,-7151.42 ; 5120.45,-7771.42 ccw(c5170.45,-7771.42) 5170.45,-7821.42 5500.45,-7821.42 ccw(c5500.45,-7781.42) 5540.45,-7781.42 5540.45,-7611.42 ccw(c5500.45,-7611.42) 5500.45,-7571.42 5120.45,-7571.42 5120.45,-7771.42 ; 5580.45,-7781.42 ccw(c5620.45,-7781.42) 5620.45,-7821.42 6530.45,-7821.42 ccw(c6530.45,-7771.42) 6580.45,-7771.42 6580.45,-7621.42 ccw(c6530.45,-7621.42) 6530.45,-7571.42 5580.45,-7571.42 5580.45,-7781.42 ; 5680.45,-7151.42 ccw(c5730.45,-7151.42) 5730.45,-7201.42 6530.45,-7201.42 ccw(c6530.45,-7151.42) 6580.45,-7151.42 6580.45,-7001.42 ccw(c6530.45,-7001.42) 6530.45,-6951.42 5680.45,-6951.42 5680.45,-7151.42
  lines w20: -14339.49,-7246.54 cw(c-14289.55,-7321.42) -14289.55,-7231.42 -13829.55,-7231.42 cw(c-13829.55,-7321.42) -13739.55,-7321.42 -13739.55,-7371.42 ccw(c-13729.55,-7371.42) -13729.55,-7381.42 -11089.55,-7381.42 cw(c-11089.55,-7471.42) -10999.55,-7471.42 -10999.55,-7811.42 cw(c-11089.55,-7811.42) -11014.68,-7861.35 ; 2535.37,-7860.08 cw(c2630.45,-7771.42) 2500.45,-7771.42 2500.45,-6951.42 cw(c2580.45,-6951.42) 2580.45,-6871.42 6530.45,-6871.42 cw(c6530.45,-7001.42) 6619.11,-6906.34 ; -14339.55,-7811.42 ccw(c-14289.55,-7811.42) -14289.55,-7861.42 -11089.55,-7861.42 ccw(c-11089.55,-7811.42) -11039.55,-7811.42 -11039.55,-7471.42 ccw(c-11089.55,-7471.42) -11089.55,-7421.42 -13729.55,-7421.42 cw(c-13729.55,-7371.42) -13779.55,-7371.42 -13779.55,-7321.42 ccw(c-13829.55,-7321.42) -13829.55,-7271.42 -14289.55,-7271.42 ccw(c-14289.55,-7321.42) -14339.55,-7321.42 -14339.55,-7811.42 ; 2540.45,-7771.42 ccw(c2630.45,-7771.42) 2630.45,-7861.42 6530.45,-7861.42 ccw(c6530.45,-7771.42) 6620.45,-7771.42 6620.45,-7001.42 ccw(c6530.45,-7001.42) 6530.45,-6911.42 2580.45,-6911.42 ccw(c2580.45,-6951.42) 2540.45,-6951.42 2540.45,-7771.42
  lines w30: -14864.55,-8377.42 7135.45,-8377.42 7135.45,8622.58 -14864.55,8622.58 -14864.55,-8377.42
  text ".Legend" at -3890.55,-3760.42 h100
  text "DESIGNED" at 2600.45,-7003.22 h32
  text "DRAWN" at 4150.45,-7003.22 h32
  text "SCALE" at 5700.45,-7003.22 h32
  text "Rich Lobdill" at 3086.45,-7099.42 h55
  text "Rich Lobdill" at 4647.45,-7101.42 h55
  text "1 : 1" at 5985.45,-7121.42 h90
  text "TITLE" at 2600.45,-7293.22 h32
  text "NOTICE" at -14284.55,-7416.42 h100
  text "175-00026, BLACKFIN SHORTING BLOCK" at 2817.45,-7437.42 h100
  text "THIS DRAWING EMBODIES A PROPRIETARY DESIGN OWNED BY LAS CUMBRES" at -14249.55,-7531.42 h60
  text "SIZE" at 2600.45,-7623.22 h32
  text "DOC NO." at 3060.45,-7623.22 h32
  text "REV" at 5140.45,-7623.22 h32
  text "SHEET" at 5600.45,-7623.22 h32
  text "OBSERVATORY.  IT IS SUBMITTED FOR A SPECIFIC PURPOSE UNDER A CON-" at -14249.55,-7631.42 h60
  text "FIDENTIAL RELATIONSHIP, AND EXCEPT FOR PURPOSES EXPRESSLY GRANTED" at -14249.55,-7726.42 h60
  text "OF" at 6030.45,-7726.42 h60
  text "2" at 5845.45,-7746.42 h100
  text "X" at 6260.45,-7746.42 h100
  text "-" at 3615.45,-7761.42 h130
  text "1" at 5280.45,-7761.42 h130
  text "C" at 2735.45,-7777.42 h120
  text "GD1" at 4435.45,-7777.42 h120
  text "IN WRITING, ALL RIGHTS ARE RESERVED BY LAS CUMBRES OBSERVATORY." at -14249.55,-7816.42 h60

## Dimensions
0,0 to 0,1417.32 on Mechanical 2
0,1417.32 to 1220.47,1417.32 on Mechanical 2